# Altium PCB PCB_Borne_de_Recharge_VE.PcbDoc
Units mil, origin at the board's own origin, x right, y up, seen from the top; angles counter-clockwise.
Board outline 2755.91 x 3149.61 mil, 2 copper layers (Top Layer, Bottom Layer); 24 components, 36 nets, 115 pads, 5 vias.
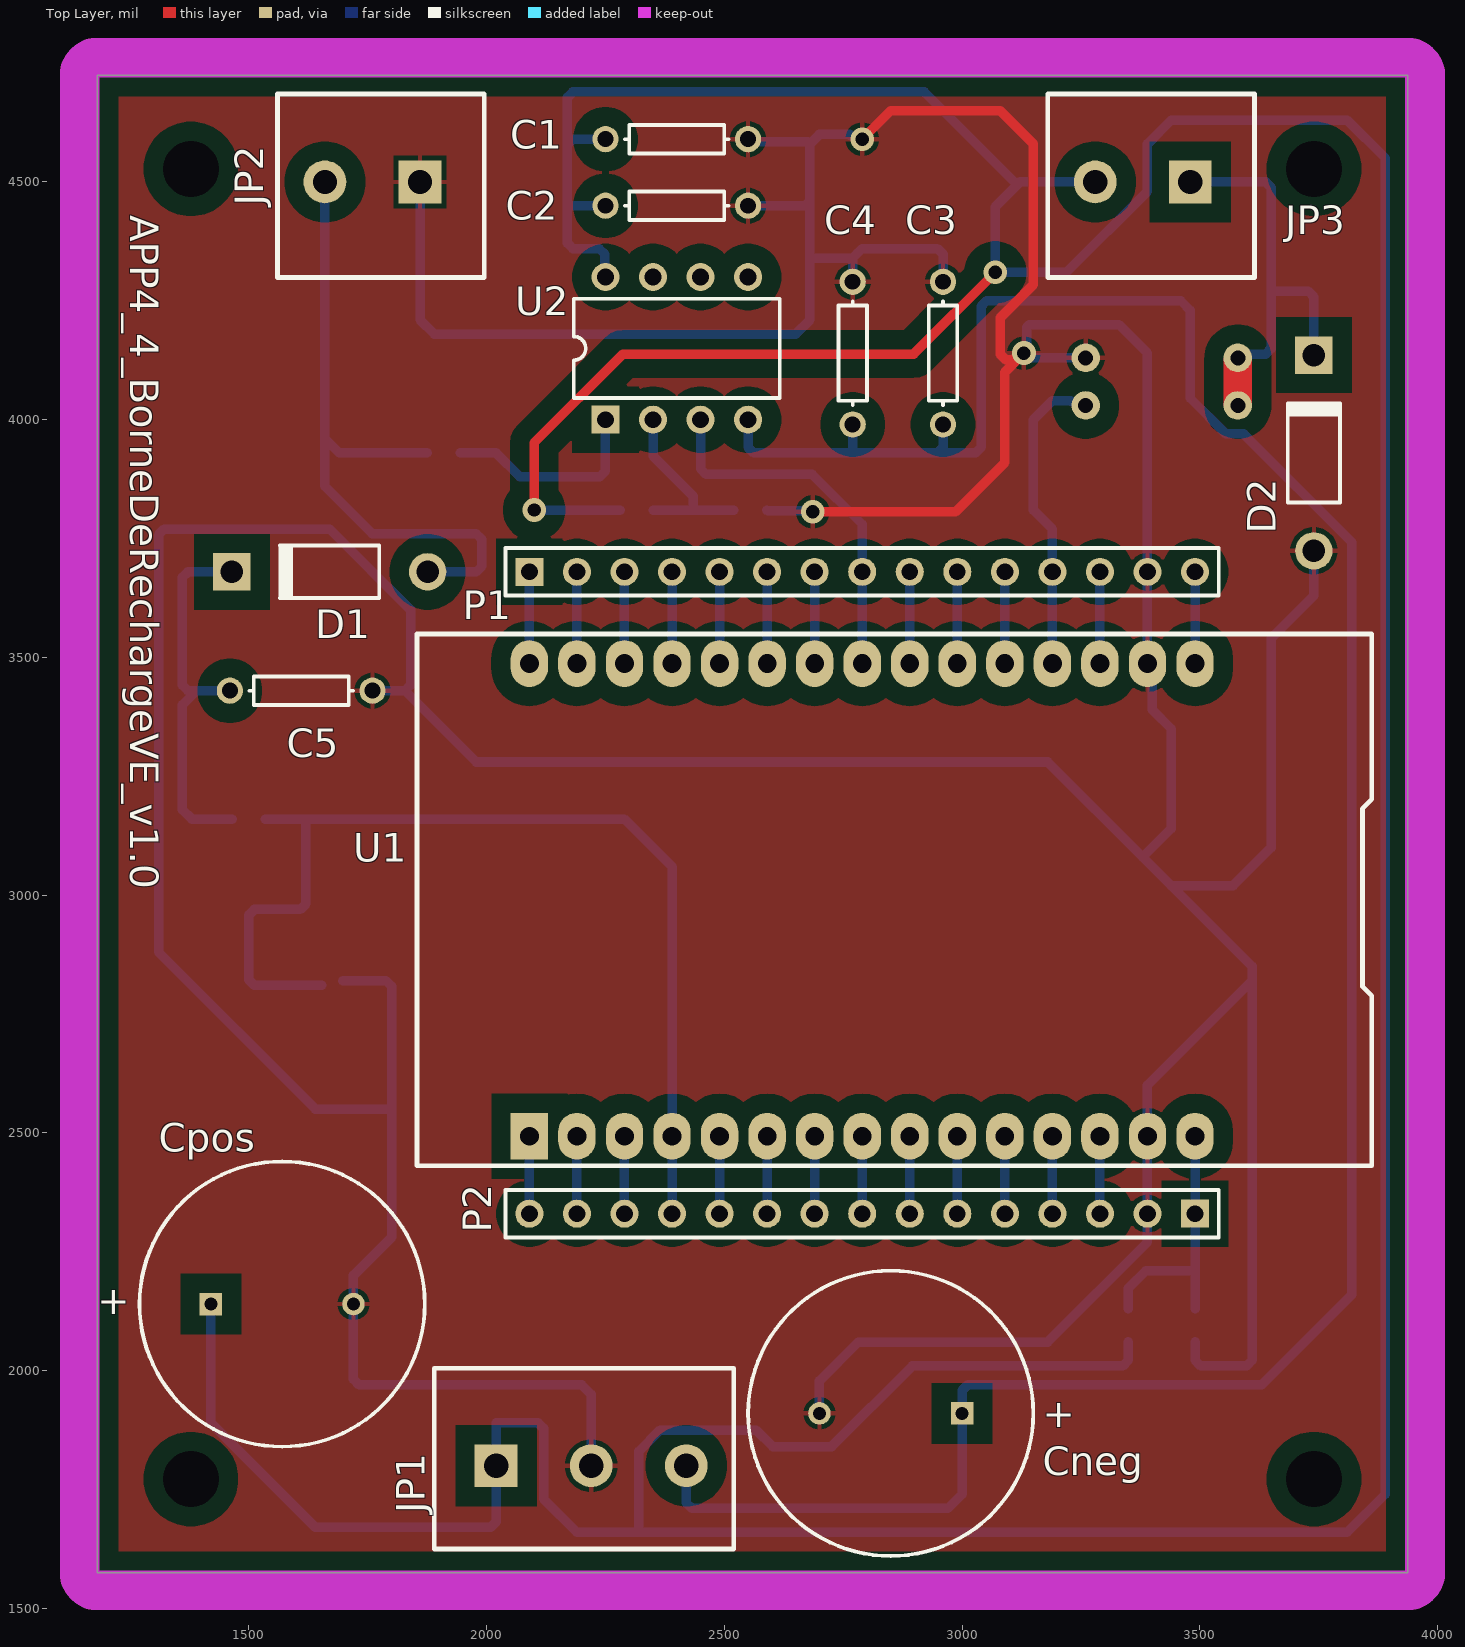
[diagram p0: Top Layer view]
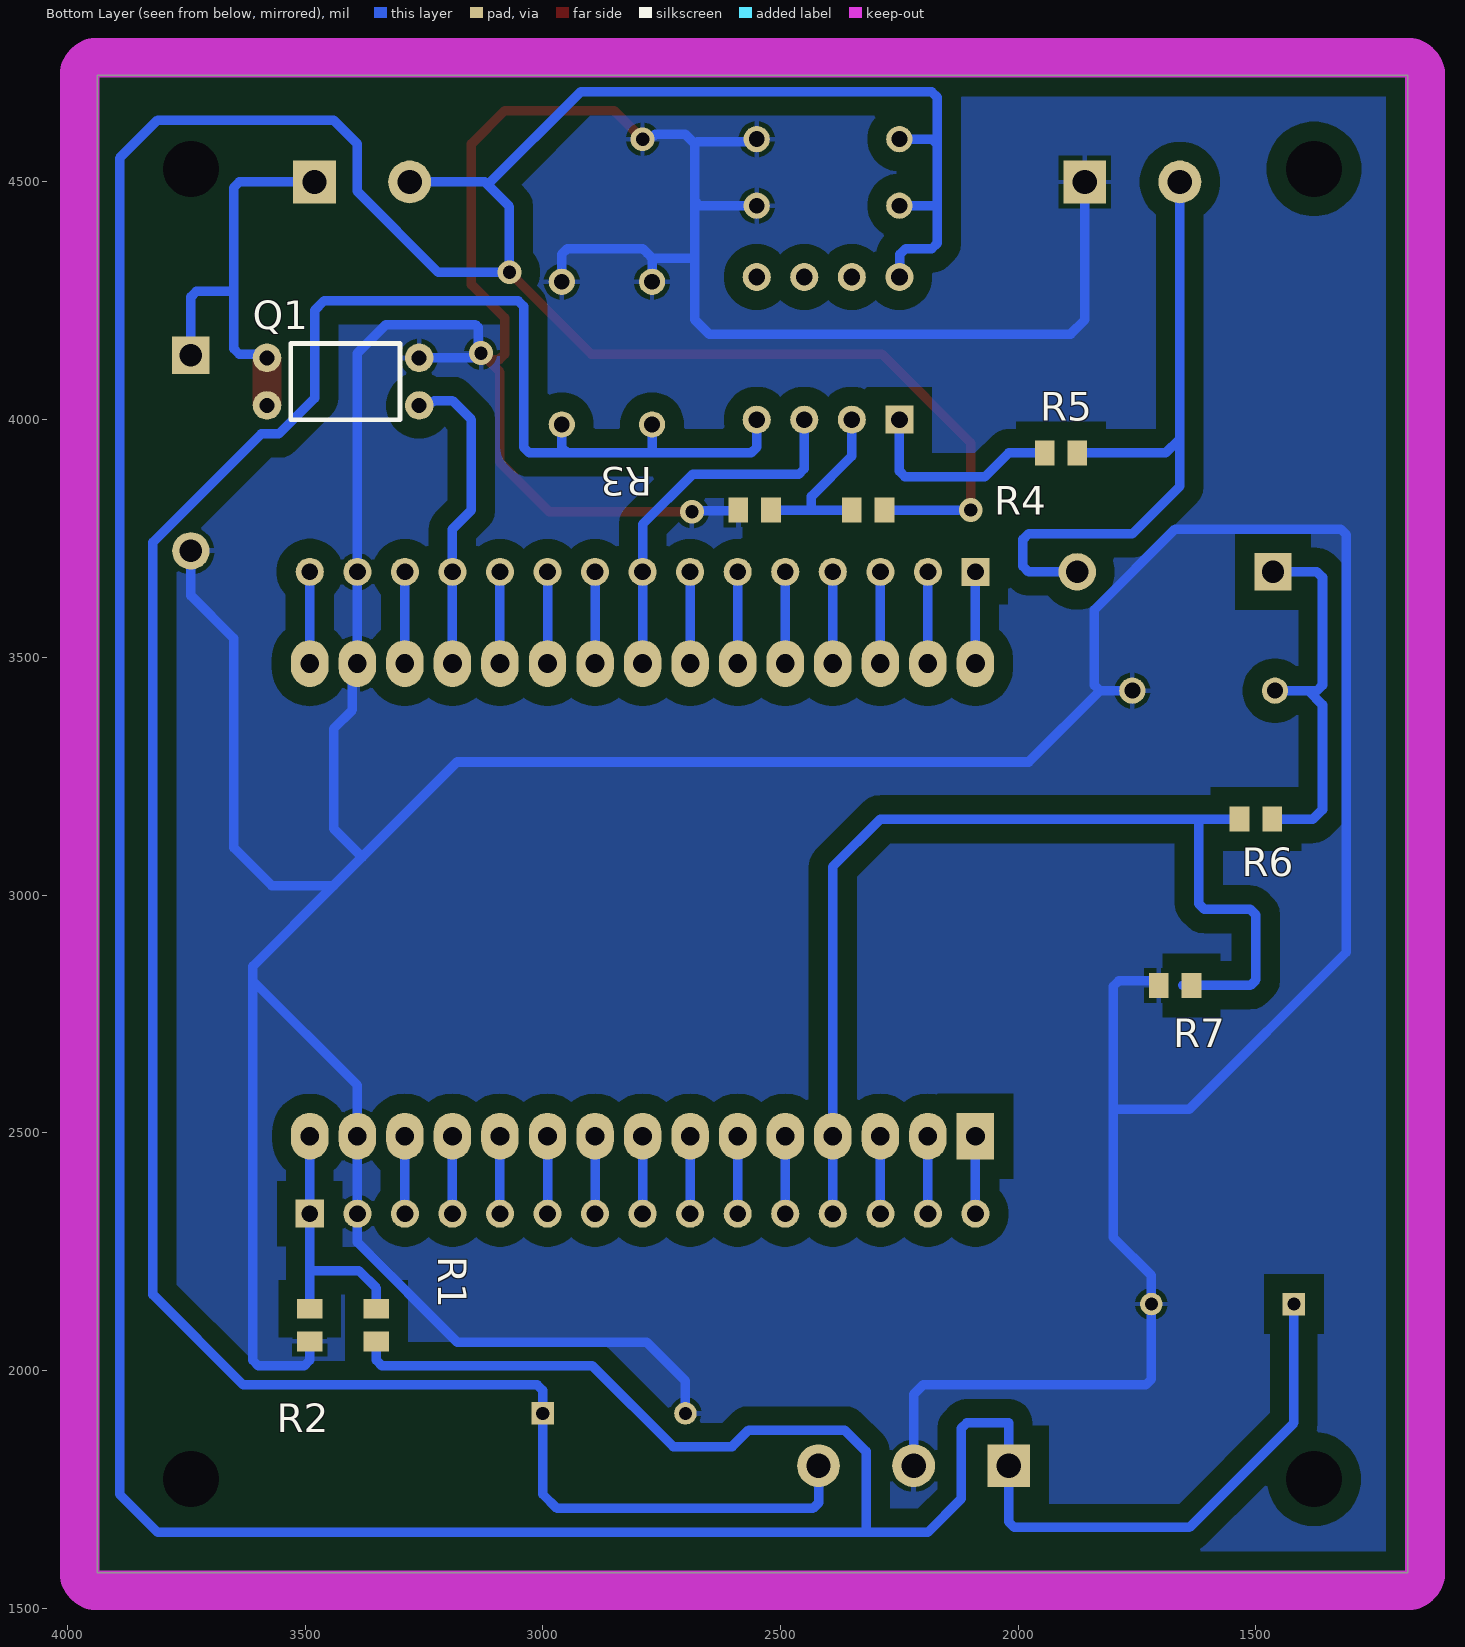
[diagram p1: Bottom Layer view, seen from below]
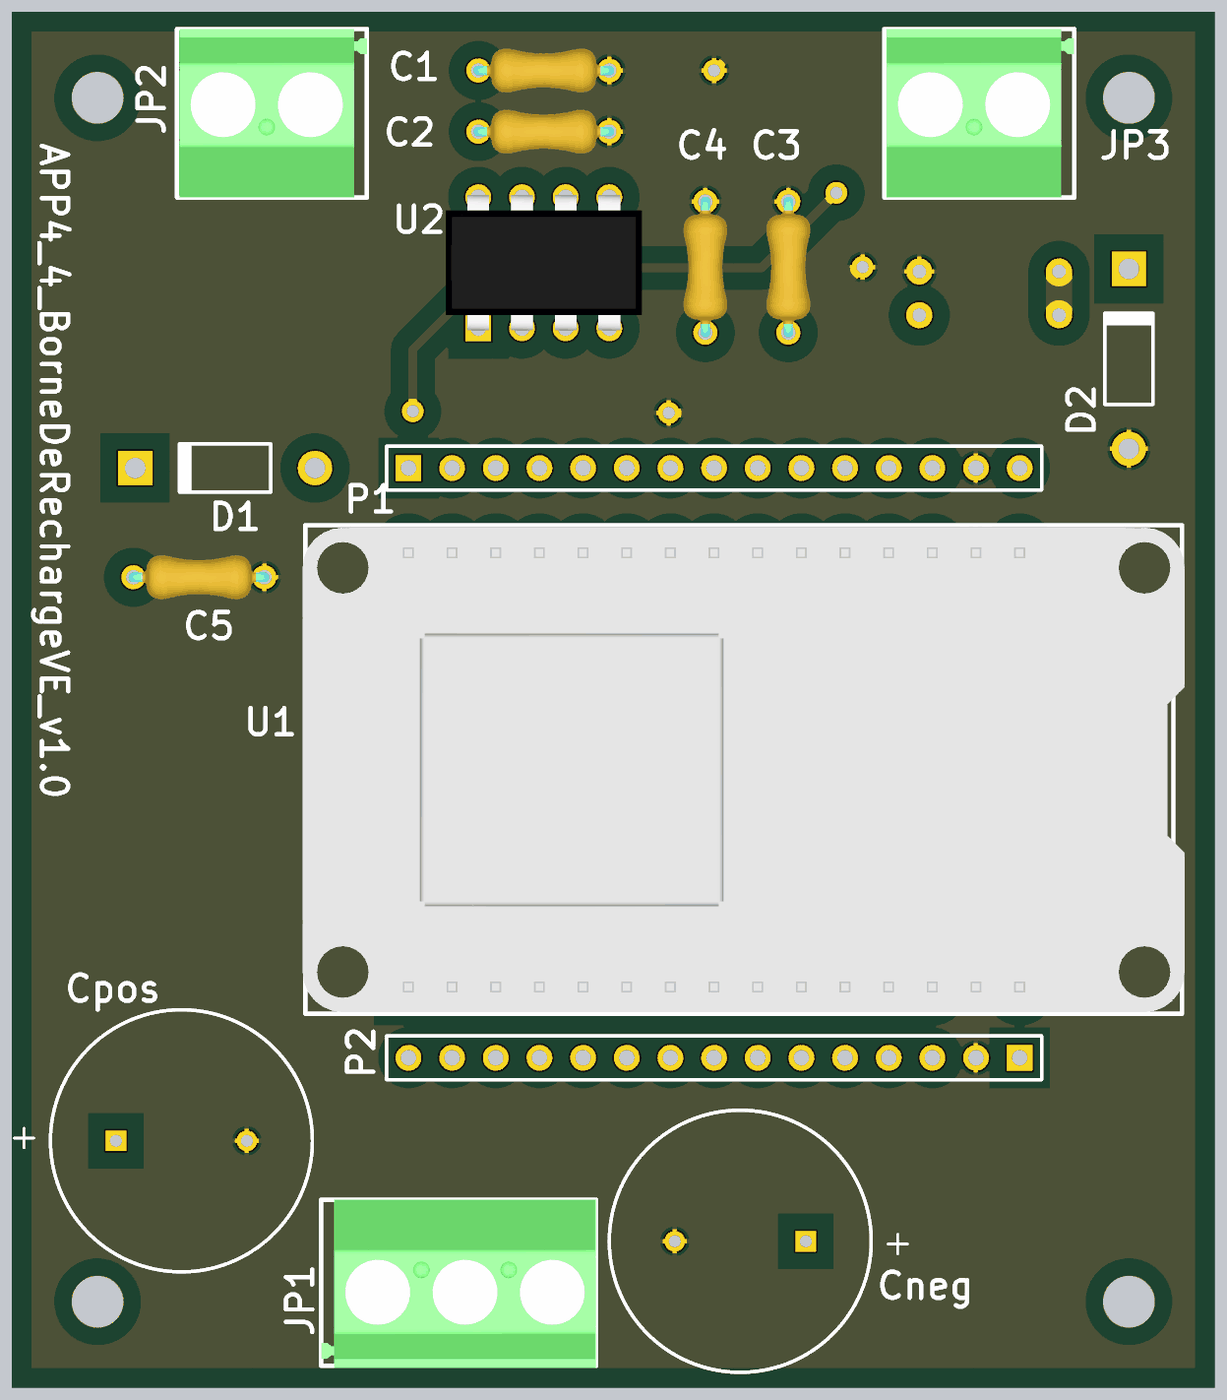
[diagram p2: 3D render of the assembled board from above, using the file's embedded part models]
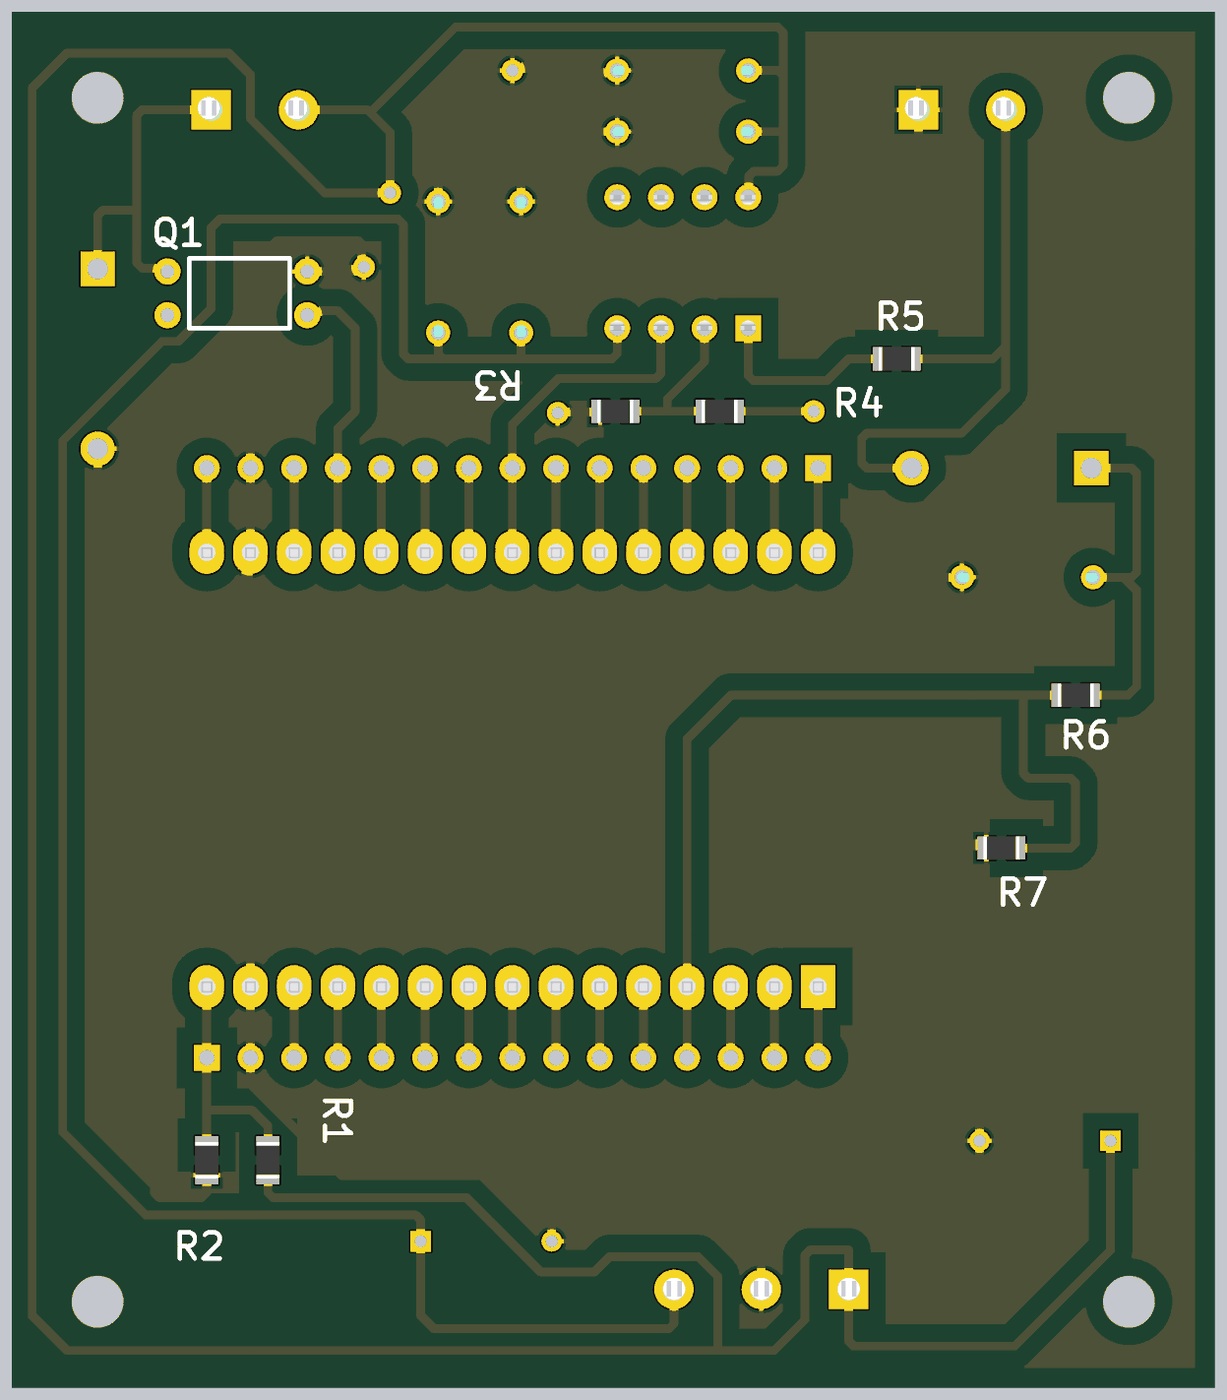
[diagram p3: 3D render of the assembled board from below, using the file's embedded part models]

## Layer stack, top to bottom
Top Solder: solder mask 0.4, Solder Resist, Dk 3.5
Top Layer: signal copper 1.4
Dielectric 1: dielectric 12.6, FR-4, Dk 4.8
Bottom Layer: signal copper 1.4
Bottom Solder: solder mask 0.4, Solder Resist, Dk 3.5

## Board outline
1181.1,1574.8 3937.01,1574.8 3937.01,4724.41 1181.1,4724.41

## Design rules (kind name [scope] priority, off if disabled: settings)
Clearance [All] p1: gap=20 ignorepadtopadclearanceinfootprint=TRUE except(40: Arc-Fill Arc-Poly Arc-Region Track-Fill Track-Poly Track-Region SMDPad-Fill SMDPad-Poly SMDPad-Region THPad-Fill THPad-Poly THPad-Region Via-Fill Via-Poly Via-Region Fill-Fill Fill-Poly Fill-Region Poly-Poly Poly-Region Region-Region)
HoleSize [All] p1: absolutevalues=TRUE maxlimit=196.85 minlimit=1 maxpercent=80.000 minpercent=20.000
PolygonConnect [All] p1: connectstyle=Relief reliefconductorwidth=10 reliefentries=4 polygonreliefangle="90 Angle" airgapwidth=10
RoutingVias [All] p1: holewidth=28 width=50 viastyle="Through Hole" minholewidth=28 minwidth=50 maxholewidth=28 maxwidth=50
SolderMaskExpansion [All] p1: expansion=4 istentingtop=FALSE
Width [All] p1: maxlimit=40 minlimit=20 preferedwidth=20
29 further rules are at their usual default settings.

## Components (designator, comment, footprint, x,y, rotation, side; value= is the part's Value field where it differs from the comment)
C1 "Capacitor tantal" AXIAL-0.3 2400,4590 r0 top value=10pF
C2 "Capacitor tantal" AXIAL-0.3 2400,4450 r0 top value=10pF
C3 "Capacitor tantal" AXIAL-0.3 2960,4140 r90 top value=10pF
C4 "Capacitor tantal" AXIAL-0.3 2770,4140 r90 top value=10pF
C5 "Capacitor tantal" AXIAL-0.3 1610,3430 r0 top value=1uF
Cneg "Cap Pol1" RB7.6-15 2850,1910 r0 top value=100pF
Cpos "Cap Pol1" RB7.6-15 1570,2140 r180 top value=100pF
D1 "Diode 1N4007" DO-41 1670,3680 r180 top
D2 "Diode 1N4007" DO-41 3740,3930 r90 top
JP1 "Screw Terminal 3/5.08" KF301_3/5.08 2020,1800 r0 top
JP2 "Screw Terminal 2/5.08" KF301_2/5.08 1860,4500 r180 top
JP3 "Screw Terminal 2/5.08" KF301_2/5.08 3480,4500 r180 top
P1 "Header 15" HDR1X15 2090,3680 r0 top
P2 "Header 15" HDR1X15 3490,2330 r180 top
Q1 "IRLD120_CMOS" TO-250 3580,4030 r180 bottom
R1 "R_01K0_0805" RESC2012X05N 3490,2095.55 r270 bottom value=1K
R2 "R_01K0_0805" RESC2012X05N 3350,2095.55 r90 bottom value=1K4
R3 "R_01K0_0805" RESC2012X05N 2554.45,3810 r180 bottom value=1K
R4 "R_01K0_0805" RESC2012X05N 2315.55,3810 r0 bottom value=11K
R5 "R_01K0_0805" RESC2012X05N 1910,3930 r180 bottom value=1K
R6 "R_01K0_0805" RESC2012X05N 1500,3160 r0 bottom value=68K
R7 "R_01K0_0805" RESC2012X05N 1670,2810 r180 bottom value=22K
U1 "Module NodeMCU ESP32" "NodeMCU ESP32" 2790,2990 r90 top
U2 "LM6142" "DIL 8" 2250,4000 r90 top

## Footprints (in the part's own frame and the unit in brackets; to place one, negate y for a bottom-side part, rotate by r counter-clockwise, add the part's x,y. Pads: shape width x height; smd on the part's side, far side on the other; paste and mask are expansions set on the pad)
AXIAL-0.3 [mm] "Axial Device, Thru-Hole; 2 Leads; 0.3 in Pin Spacing"
  round 1.4 hole 0.85: 1(-3.81,0) 2(3.81,0)
  silkscreen extent -2.77,-0.76 2.77,0.76, body extent -4.09,-1.27 4.09,1.27, height 2.64
"DIL 8" [mm]
  rect 1.5x1.5 hole 0.9: 1(0,0)
  round 1.5 hole 0.9: 2(0,-2.54) 3(0,-5.08) 4(0,-7.62) 5(7.62,-7.62) 6(7.62,-5.08) 7(7.62,-2.54) 8(7.62,0)
  silkscreen extent 1.16,-9.31 6.46,1.69, body extent -0.13,-9.52 7.75,1.91, height 4.19
DO-41 [mm] "Diode, Axial; Body 5.2 x 2.7 mm (LxDia. max), Lead Dia. 0.86 mm (max)"
  round 2 hole 1.2: 1(-5.23,0)
  rect 2x2 hole 1.2: 2(5.23,0)
  silkscreen extent -2.65,-1.4 2.75,1.4
HDR1X15 [mm] "Connector; Header; 15 Position"
  rect 1.5x1.5 hole 0.9: 1(0,0)
  round 1.5 hole 0.9: 2(2.54,0) 3(5.08,0) 4(7.62,0) 5(10.16,0) 6(12.7,0) 7(15.24,0) 8(17.78,0) 9(20.32,0) 10(22.86,0) 11(25.4,0) 12(27.94,0) 13(30.48,0) 14(33.02,0) 15(35.56,0)
  silkscreen extent -1.27,-1.27 36.83,1.27
KF301_2/5.08 [mil]
  rect 90x90 hole 51.18: 0(0,0)
  round 90 hole 51.18: 1(200,0)
  silkscreen extent -135,-185 300,201, body extent -135,-185 295,201, height 559
KF301_3/5.08 [mil]
  rect 90x90 hole 51.18: 0(0,0)
  round 90 hole 51.18: 1(200,0) 2(400,0)
  silkscreen extent -130,-175 500,205, body extent -130,-180 500,206, height 559
"NodeMCU ESP32" [mm]
  rect 2.5x2 hole 1: 1(-12.625,17.78)
  oval 2.5x2 hole 1: 2(-12.625,15.24) 3(-12.625,12.7) 4(-12.625,10.16) 5(-12.625,7.62) 6(-12.625,5.08) 7(-12.625,2.54) 8(-12.625,0) 9(-12.625,-2.54) 10(-12.625,-5.08) 11(-12.625,-7.62) 12(-12.625,-10.16) 13(-12.625,-12.7) 14(-12.625,-15.24) 15(-12.625,-17.78) 16(12.625,-17.78) 17(12.625,-15.24) 18(12.625,-12.7) 19(12.625,-10.16) 20(12.625,-7.62) 21(12.625,-5.08) 22(12.625,-2.54) 23(12.625,0) 24(12.625,2.54) 25(12.625,5.08) 26(12.625,7.62) 27(12.625,10.16) 28(12.625,12.7) 29(12.625,15.24) 30(12.625,17.78)
  silkscreen extent -14.2,-27.22 14.2,23.78, body extent -14.11,-27.37 14.06,23.94, height 6.89
RB7.6-15 [mm] "Polarized Capacitor (Radial); 2 Leads"
  rect 1.2x1.2 hole 0.7: 1(3.81,0)
  round 1.2 hole 0.7: 2(-3.81,0)
  silkscreen extent -7.62,-7.62 7.62,7.62
RESC2012X05N [mm] "Chip Resistor, 2-Leads, Body 2,00x1,25mm, IPC Medium Density"
  rect 1.05x1.35 smd: 1(-0.875,0) 2(0.875,0)
  body extent -1.05,-0.67 1.05,0.67, height 0.5
TO-250 [mil] "Type IRLD120"
  round 60 hole 31.5: 1(0,0) 1(0,100) 2(320,100) 3(320,0)
  Bottom Layer region: -30,100 30,100 30,0 -30,0
  silkscreen extent 50,-30 280,130, body extent 50,-30 280,130, height 160

## Part data
C1 C2 C3 C4 C5: "Capacitor", LatestRevisionDate=29-May-2009, LatestRevisionNote="IPC-7351 Footprint Added.", PackageDescription="Chip Capacitor", PackageReference=C0805, Published=8-Jun-2000, Publisher="Altium Limited"
Cneg Cpos: "Polarized Capacitor (Radial)", LatestRevisionDate=17-Jul-2002, LatestRevisionNote="Re-released for DXP Platform.", PackageDescription="Polarized Capacitor (Radial); 2 Leads", PackageReference=RB7.6-15, Published=8-Jun-2000, Publisher="Altium Limited"
D1 D2: "1 Amp General Purpose Rectifier", Code_JEDEC=DO-204-AL, ComponentLink1Description="Manufacturer Link", ComponentLink1URL=http://www.fairchildsemi.com/, ComponentLink2Description=Datasheet, ComponentLink2URL=http://www.fairchildsemi.com/ds/1N%2F1N4001.pdf, DatasheetVersion=1998, LatestRevisionDate=17-Jul-2002, LatestRevisionNote="Re-released for DXP Platform.", PackageDescription="Diode, Axial; Body 5.2 x 2.7 mm (LxDia. max), Lead Dia. 0.86 mm (max)", PackageReference=DO-41, PackageVersion=Aug-1999, Published=8-Jun-2000, Publisher="Altium Limited"
JP1: "KF301 3 contacts / 5.08 mm", Supplier Part Number 1=3041530, Supplier 1=Farnell
JP2 JP3: "KF301 2 contacts / 5.08mm", Supplier Part Number 1=3041529, Supplier 1=Farnell
P1 P2: "Header, 15-Pin", LatestRevisionDate=17-Jul-2002, LatestRevisionNote="Re-released for DXP Platform.", Publisher="Altium Limited"
Q1: library part IRLD120, "N-Channel MOSFET", Supplier Part Number 1=9102531, LatestRevisionDate=17-Jul-2002, LatestRevisionNote="Re-released for DXP Platform.", PackageDescription="TO, Flat Index; 3 In-Line, Axial Leads; Body Dia. 4.6mm; Lead Dia. 0.5 mm (max)", PackageReference=E3, PackageVersion=1995/1996, Published=8-Jun-2000, Publisher="Altium Limited", Supplier 1=Farnell
R1 R2 R3 R4 R5 R6 R7: "Resistor 1K Ohms 1/4W 0805 1%", Mounting=YES
U1: library part "NodeMCU ESP 32"
U2: "17 MHz Rail-to-Rail Input-Output Operational Amplifier", Supplier Part Number 1=926-LM6142BIM, Code_JEDEC=MO-001-AN, ComponentLink1Description="Manufacturer Link", ComponentLink1URL=http://www.ti.com/, ComponentLink2Description=Datasheet, ComponentLink2URL=http://www-s.ti.com/sc/ds/tl082.pdf, DatasheetVersion=Feb-1999, LatestRevisionDate=04-Mar-2005, LatestRevisionNote="Stylized 3D Model Added.", PackageDescription="DIP; 8 Leads; Row Spacing 7.62 mm; Pitch 2.54 mm", PackageReference=P008, PackageVersion=Jun-1999, Published=16-Jan-2001, Publisher="Altium Limited", Supplier 1=Mouser

## Free pads (board coordinates)
  round 60 hole 118.11: 21(1377.95,4527.56) 22(3740.16,4527.56) 23(3740.16,1771.65) 24(1377.95,1771.65)

## Via types
v1: diameter 50, hole 28, Top Layer to Bottom Layer, 5 vias

## Nets (pads, with @x,y where several pads share a name; then routed paths per layer and width w, separated by ;. In a path a pad name is that pad's centre, name@x,y a point inside that pad or via, vN(x,y) a via of type N, cw(c..) or ccw(c..) an arc to the next point about the centre after c; other vN are vias at no path point)
+12V: C1.1 C2.1 Cpos.1 JP1.0 JP3.1 R2.1 R4.1 U2.8 | length 11882.1
  Top Layer w20: v1@2100,3820 2100,3951.48 2286.63,4138.11 2898.11,4138.11 v1(3070,4310)
  Bottom Layer w20: Cpos.1 1420,1890 1640,1670 2008.28,1670 2020,1681.72 JP1.0 2020,1890 2108.28,1890 2120,1878.28 2120,1730 2190,1660 2320,1660 ; v1(2100,3810) R4.1 ; U2.8 2248.76,4301.24 2248.76,4347.81 2237.04,4359.53 2181.72,4359.53 2170,4371.24 2170,4450 ; C2.1 2170,4450 ; C1.1 2181.72,4590 2170,4578.28 ; 3115.86,4494.14 2920.59,4689.41 2181.72,4689.41 2170,4677.69 2170,4578.28 ; JP3.1 3121.72,4500 3070,4448.28 v1(3070,4310) 3220,4310 3390,4480 3390,4580 3440,4630 3810,4630 3890,4550 3890,1740 3810,1660 2320,1660 ; R2.1 3350,2021.72 3338.28,2010 2895.53,2010 2725.53,1840 2601.97,1840 2566.97,1875 2365,1875 2320,1830 2320,1660 ; 2170,4450 2170,4578.28
-12V: C3.1 C4.1 Cneg.1 JP1.2 U2.4 | length 5462.5
  Bottom Layer w20: JP1.2 2420,1721.72 2431.72,1710 2970,1710 3000,1740 Cneg.1 3000,1958.28 3011.72,1970 3630,1970 3820,2160 3820,3742.2 3592.2,3970 3555.15,3970 3480,4045.15 3480,4230 3460,4250 3051.72,4250 3040,4238.28 3040,3941.72 3028.28,3930 2948.28,3930 ; U2.4 2550,3941.72 2561.72,3930 2770,3930 ; C4.1 2770,3930 ; C3.1 2960,3941.72 2948.28,3930 ; 2770,3930 2948.28,3930
ALIM_ESP32: P2.1 R1.1 R2.2 U1.15 | length 561.5
  Bottom Layer w20: R2.2 3350,2173.43 3386.57,2210 3490,2210 ; R1.1 3490,2210 ; U1.15 P2.1 3490,2210
Commande_Contacteur: P1.12 Q1.3 U1.19 | length 660.2
  Bottom Layer w20: U1.19 P1.12 3190,3770 3150,3810 3150,4000 3190,4040 3228.28,4040 3230.63,4037.65 3252.35,4037.65 Q1.3
GND: C1.2 C2.2 C3.2 C4.2 C5.2 Cneg.2 Cpos.2 D2.1 JP1.1 JP2.0 P1.14 P2.2 Q1.2 R1.2 R3.1 R7.1 U1.14 U1.17 | length 15037
  Top Layer w20: v1(2686.11,3806.11) 2986.11,3806.11 3090,3910 3090,4100 v1(3130,4140) 3121.88,4140 3108.28,4126.4 3091.72,4126.4 3080,4138.12 3080,4214.06 3150,4284.06 3150,4580 3080,4650 2850,4650 v1(2790,4590) ; U1.17 U1.17@3390,3512.78
  Bottom Layer w20: R7.1@1697.43,2820 1788.28,2820 1800,2808.28 1800,2550 ; C5.2 1828.28,3430 ; JP2.0 1860,4210 1890,4180 2650,4180 2680,4210 2680,4340 ; JP1.1 2220,1950 2200,1970 1731.72,1970 1720,1981.72 Cpos.2 1720,2200 1800,2280 1800,2550 ; C2.2 2670,4450 2680,4460 ; C1.2 2555,4585 2675,4585 2680,4580 ; R3.1 2590.84,3808.05 2684.16,3808.05 v1(2686.11,3806.11) ; Cneg.2 2700,1978.28 2781.72,2060 3180,2060 3390,2270 P2.2 U1.14 3390,2600 3610,2820 ; C4.2 2770,4340 ; v1(2790,4590) 2784.26,4595.74 2767.54,4595.74 2763.28,4600 2700,4600 2680,4580 ; C3.2 2960,4348.28 2948.28,4360 2790,4360 2780,4350 2770,4340 ; v1(3130,4140) 3135.74,4145.74 3135.74,4194.02 3141.72,4200 3330,4200 3390,4140 P1.14 U1.17 3400.45,3476.6 3400.45,3389.55 3440,3350 3440,3140 3380,3080 ; v1@3148.12,4130 3241.52,4130 3247.49,4124.03 Q1.2@3255.15,4124.03 ; R1.2 3490,2021.72 3501.72,2010 3598.28,2010 3610,2021.72 3610,2788 ; 3608.59,2851.41 3440,3020 ; 3610,2790 3610,2820 ; 3610,2850 3610,2820 ; D2.1 3740,3630 3650,3540 3650,3100 3570,3020 3440,3020 ; 1800,2550 1640,2550 1310,2880 1310,3758.28 1321.72,3770 1670,3770 1840,3600 1840,3441.72 1828.28,3430 ; 1828.28,3430 1978.28,3280 3180,3280 3380,3080 ; 2680,4340 2680,4450 2680,4460 ; 2680,4340 2770,4340 ; 2680,4460 2680,4570 2680,4580 ; 3380,3080 3440,3020
NetC5_1: C5.1 D1.2 R6.1 | length 816.6
  Bottom Layer w20: C5.1 1390,3430 ; D1.2 1371.72,3680 1360,3668.28 1360,3441.72 1371.72,3430 1390,3430 ; R6.1 1380,3160 1360,3180 1360,3400 1390,3430
NetD1_1: D1.1 JP2.1 R5.2 | length 1419.8
  Bottom Layer w20: JP2.1 1660,3960 ; R5.2 1690,3930 1660,3960 ; D1.1 1978.28,3680 1990,3691.72 1990,3748.28 1978.28,3760 1760,3760 1660,3860 1660,3960
NetD2_2: D2.2 JP3.0 Q1.1 | length 809
  Bottom Layer w20: JP3.0 3638.28,4500 3650,4488.28 3650,4270 ; Q1.1@3580,4130 3587.65,4137.65 3638.28,4137.65 3650,4149.37 3650,4270 ; D2.2 3740,4258.28 3728.28,4270 3650,4270
NetP1_1: P1.1 U1.30 | length 193
  Bottom Layer w20: U1.30 P1.1
NetP1_2: P1.2 U1.29 | length 193
  Bottom Layer w20: U1.29 P1.2
NetP1_3: P1.3 U1.28 | length 193
  Bottom Layer w20: U1.28 P1.3
NetP1_4: P1.4 U1.27 | length 193
  Bottom Layer w20: U1.27 P1.4
NetP1_5: P1.5 U1.26 | length 193
  Bottom Layer w20: U1.26 P1.5
NetP1_6: P1.6 U1.25 | length 193
  Bottom Layer w20: U1.25 P1.6
NetP1_7: P1.7 U1.24 | length 193
  Bottom Layer w20: U1.24 P1.7
NetP1_9: P1.9 U1.22 | length 193
  Bottom Layer w20: U1.22 P1.9
NetP1_10: P1.10 U1.21 | length 193
  Bottom Layer w20: U1.21 P1.10
NetP1_11: P1.11 U1.20 | length 193
  Bottom Layer w20: U1.20 P1.11
NetP1_13: P1.13 U1.18 | length 193
  Bottom Layer w20: U1.18 P1.13
NetP1_15: P1.15 U1.16 | length 193
  Bottom Layer w20: U1.16 P1.15
NetP2_3: P2.3 U1.13 | length 163
  Bottom Layer w20: P2.3 U1.13
NetP2_4: P2.4 U1.12 | length 163
  Bottom Layer w20: P2.4 U1.12
NetP2_5: P2.5 U1.11 | length 163
  Bottom Layer w20: P2.5 U1.11
NetP2_6: P2.6 U1.10 | length 163
  Bottom Layer w20: P2.6 U1.10
NetP2_7: P2.7 U1.9 | length 163
  Bottom Layer w20: P2.7 U1.9
NetP2_8: P2.8 U1.8 | length 163
  Bottom Layer w20: P2.8 U1.8
NetP2_9: P2.9 U1.7 | length 163
  Bottom Layer w20: P2.9 U1.7
NetP2_10: P2.10 U1.6 | length 163
  Bottom Layer w20: P2.10 U1.6
NetP2_11: P2.11 U1.5 | length 163
  Bottom Layer w20: P2.11 U1.5
NetP2_13: P2.13 U1.3 | length 163
  Bottom Layer w20: P2.13 U1.3
NetP2_14: P2.14 U1.2 | length 163
  Bottom Layer w20: P2.14 U1.2
NetP2_15: P2.15 U1.1 | length 163
  Bottom Layer w20: P2.15 U1.1
NetR3_2: R3.2 R4.2 U2.2 | length 395.2
  Bottom Layer w20: R4.2 2435,3810 ; U2.2 2350,3923.43 2435,3838.43 2435,3810 ; R3.2 2435,3810
NetR5_1: R5.1 U2.1 | length 439.4
  Bottom Layer w20: R5.1 2020,3930 2070,3880 2238.28,3880 2250,3891.72 U2.1
Signal_CAN: P2.12 R6.2 R7.2 U1.4 | length 2230.2
  Bottom Layer w20: R6.2 1620,3160 ; R7.2@1653.78,2810 1511.72,2810 1500,2821.72 1500,2958.28 1511.72,2970 1608.28,2970 1620,2981.72 1620,3160 ; P2.12 U1.4 2390,3060 2290,3160 1620,3160
Signal_Pilote: P1.8 U1.23 U2.3 | length 784.6
  Bottom Layer w20: U2.3 2450,3896.72 2461.72,3885 2685,3885 2790,3780 P1.8 U1.23
pads on no net: U2.5 U2.6 U2.7

## Polygon pours and split planes (outlines as drawn)
GND on Top Layer "GND_L01_P001" (solid, remove dead copper, pour order 1): 1160,4750 1160,1580 3950,1580 3950,4740
GND on Bottom Layer "GND_L02_P000" (solid, remove dead copper, pour order 0): 1180,4730 1180,1580 3930,1580 3940,1570 3940,4730

## Keep-outs
Keep-Out Layer:
  lines w10: 1181.1,1574.8 1181.1,4724.41 3937.01,4724.41 3937.01,1574.8 1181.1,1574.8
  lines w78.74: 1141.73,1574.8 ccw(c1181.1,1574.8) 1181.1,1535.43 ; 1141.73,1574.8 ccw(c1181.1,1574.8) 1181.1,1535.43 ; 1141.73,1574.8 1141.73,4724.41 ; 1141.73,4724.41 cw(c1181.1,4724.41) 1181.1,4763.78 ; 1141.73,4724.41 cw(c1181.1,4724.41) 1181.1,4763.78 ; 1181.1,1535.43 3937.01,1535.43 ; 1181.1,4763.78 3937.01,4763.78 ; 3937.01,1535.43 ccw(c3937.01,1574.8) 3976.38,1574.8 ; 3937.01,1535.43 ccw(c3937.01,1574.8) 3976.38,1574.8 ; 3937.01,4763.78 cw(c3937.01,4724.41) 3976.38,4724.41 ; 3937.01,4763.78 cw(c3937.01,4724.41) 3976.38,4724.41 ; 3976.38,1574.8 3976.38,4724.41

## Silkscreen, mask and mechanical layers (free items; w line width, h text height)
Top Overlay:
  text "APP4_4_BorneDeRechargeVE_v1.0" at 1249.99,4430 h60 r270
Route Tool Path:
  lines w78.74: 1141.73,1574.8 ccw(c1181.1,1574.8) 1181.1,1535.43 ; 1141.73,1574.8 ccw(c1181.1,1574.8) 1181.1,1535.43 ; 1141.73,1574.8 1141.73,4724.41 ; 1141.73,4724.41 cw(c1181.1,4724.41) 1181.1,4763.78 ; 1141.73,4724.41 cw(c1181.1,4724.41) 1181.1,4763.78 ; 1181.1,1535.43 3937.01,1535.43 ; 1181.1,4763.78 3937.01,4763.78 ; 3937.01,1535.43 ccw(c3937.01,1574.8) 3976.38,1574.8 ; 3937.01,1535.43 ccw(c3937.01,1574.8) 3976.38,1574.8 ; 3937.01,4763.78 cw(c3937.01,4724.41) 3976.38,4724.41 ; 3937.01,4763.78 cw(c3937.01,4724.41) 3976.38,4724.41 ; 3976.38,1574.8 3976.38,4724.41

## Dimensions
1377.95,4527.56 to 3740.16,4527.56 on Route Tool Path
1181.1,1574.8 to 3937.01,4724.41 on Route Tool Path
1377.95,4527.56 to 1377.95,1771.65 on Route Tool Path
1181.1,4724.41 to 1181.1,1574.8 on Route Tool Path

## Text inside footprints (layer, text, board x,y; h text height)
Cneg: Top Overlay "+" at 3170.15,1880.99 h59.06
Cpos: Top Overlay "+" at 1249.85,2169.01 h59.06 r180